# Altium PCB SensorBoard_Circuit.PcbDoc
Units mm, origin at the board's own origin, x right, y up, seen from the top; angles counter-clockwise.
Board outline 26.1 x 43.9 mm, 2 copper layers (Top Layer, Bottom Layer); 3 components, 18 nets, 62 pads, 88 vias.
Unrouted connection lines stored in the file: 16.
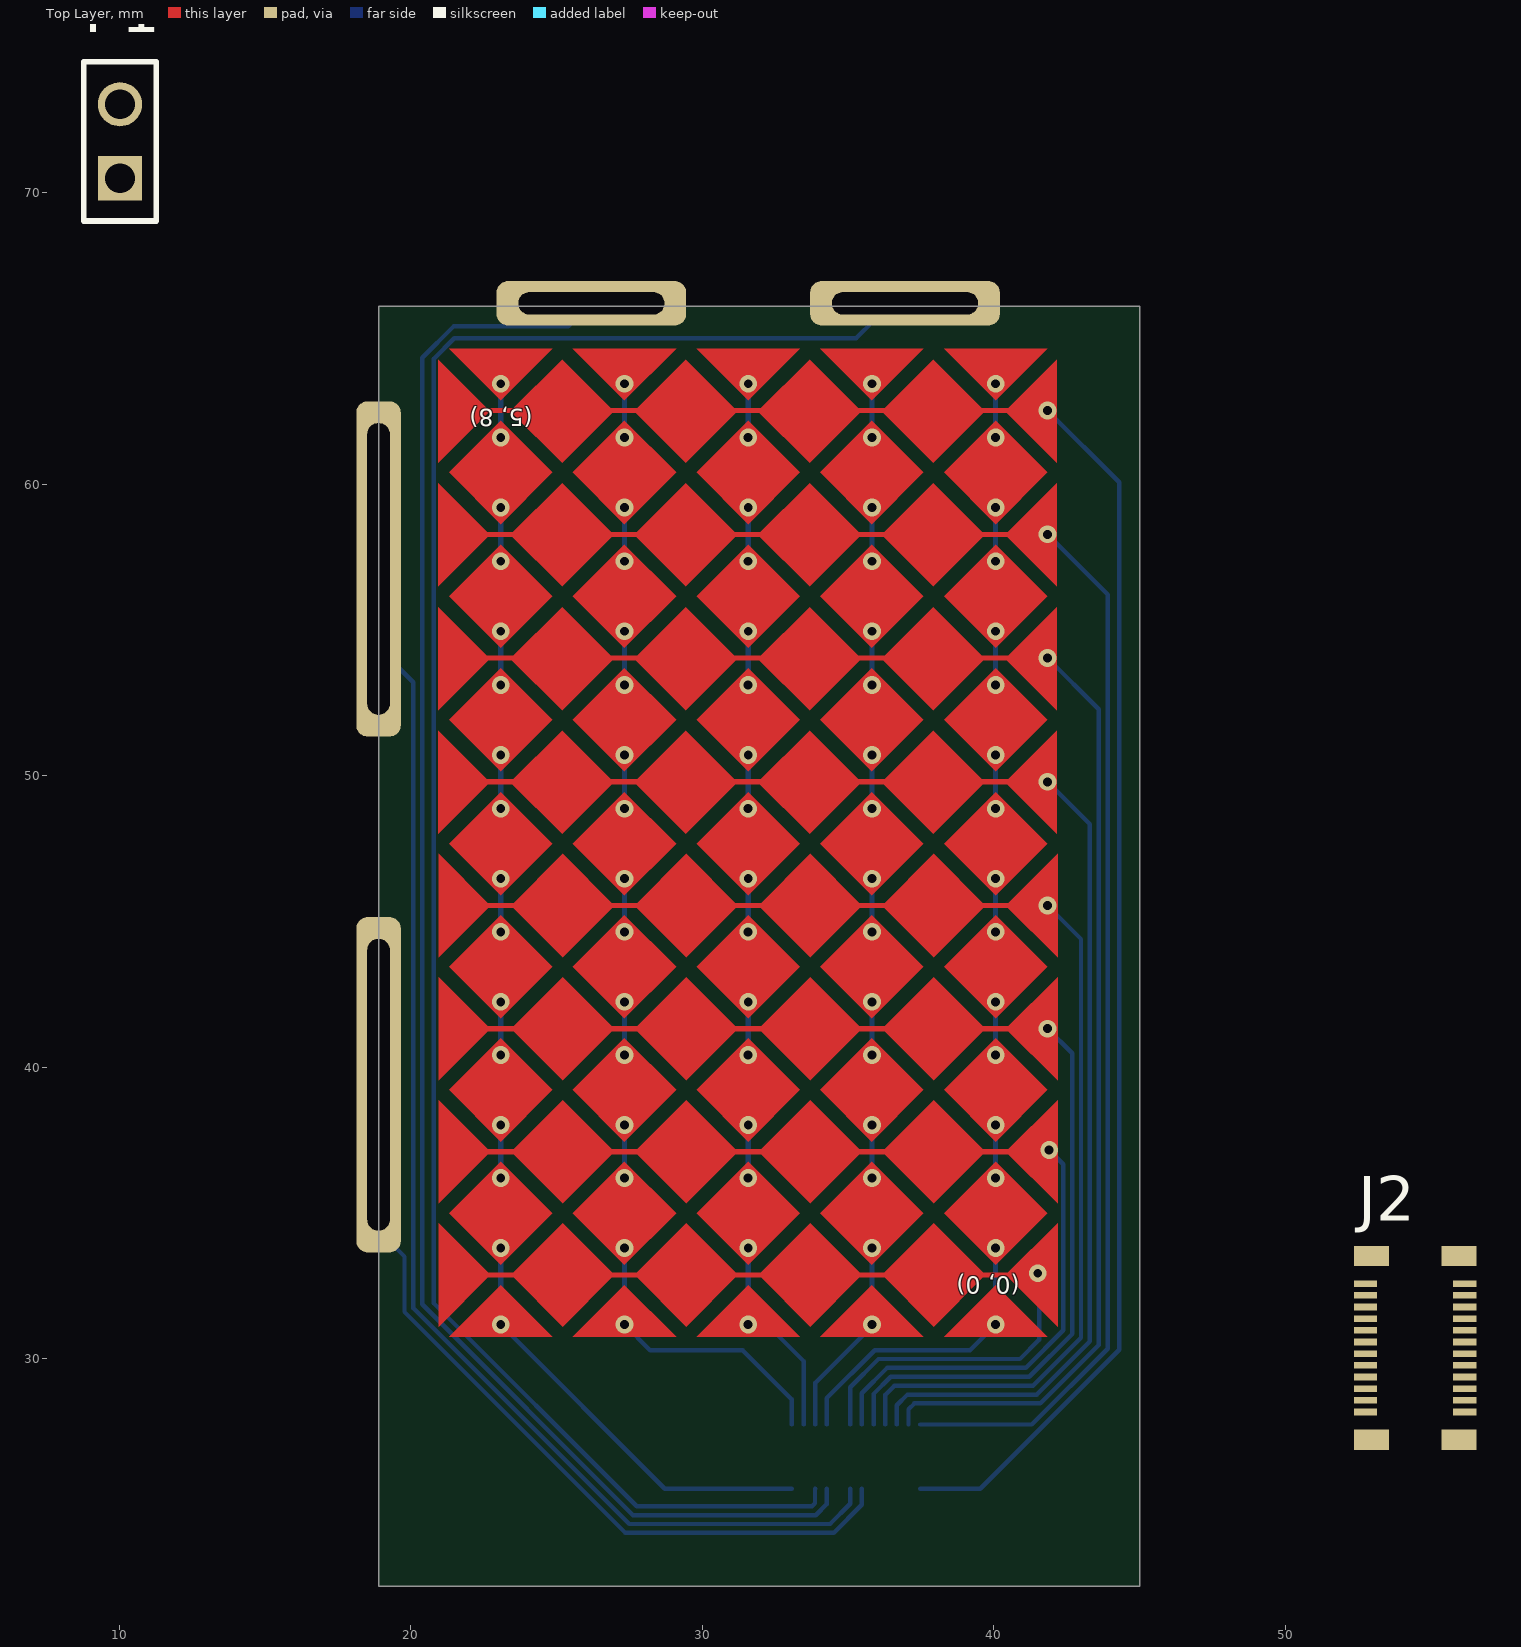
[diagram p0: Top Layer view]
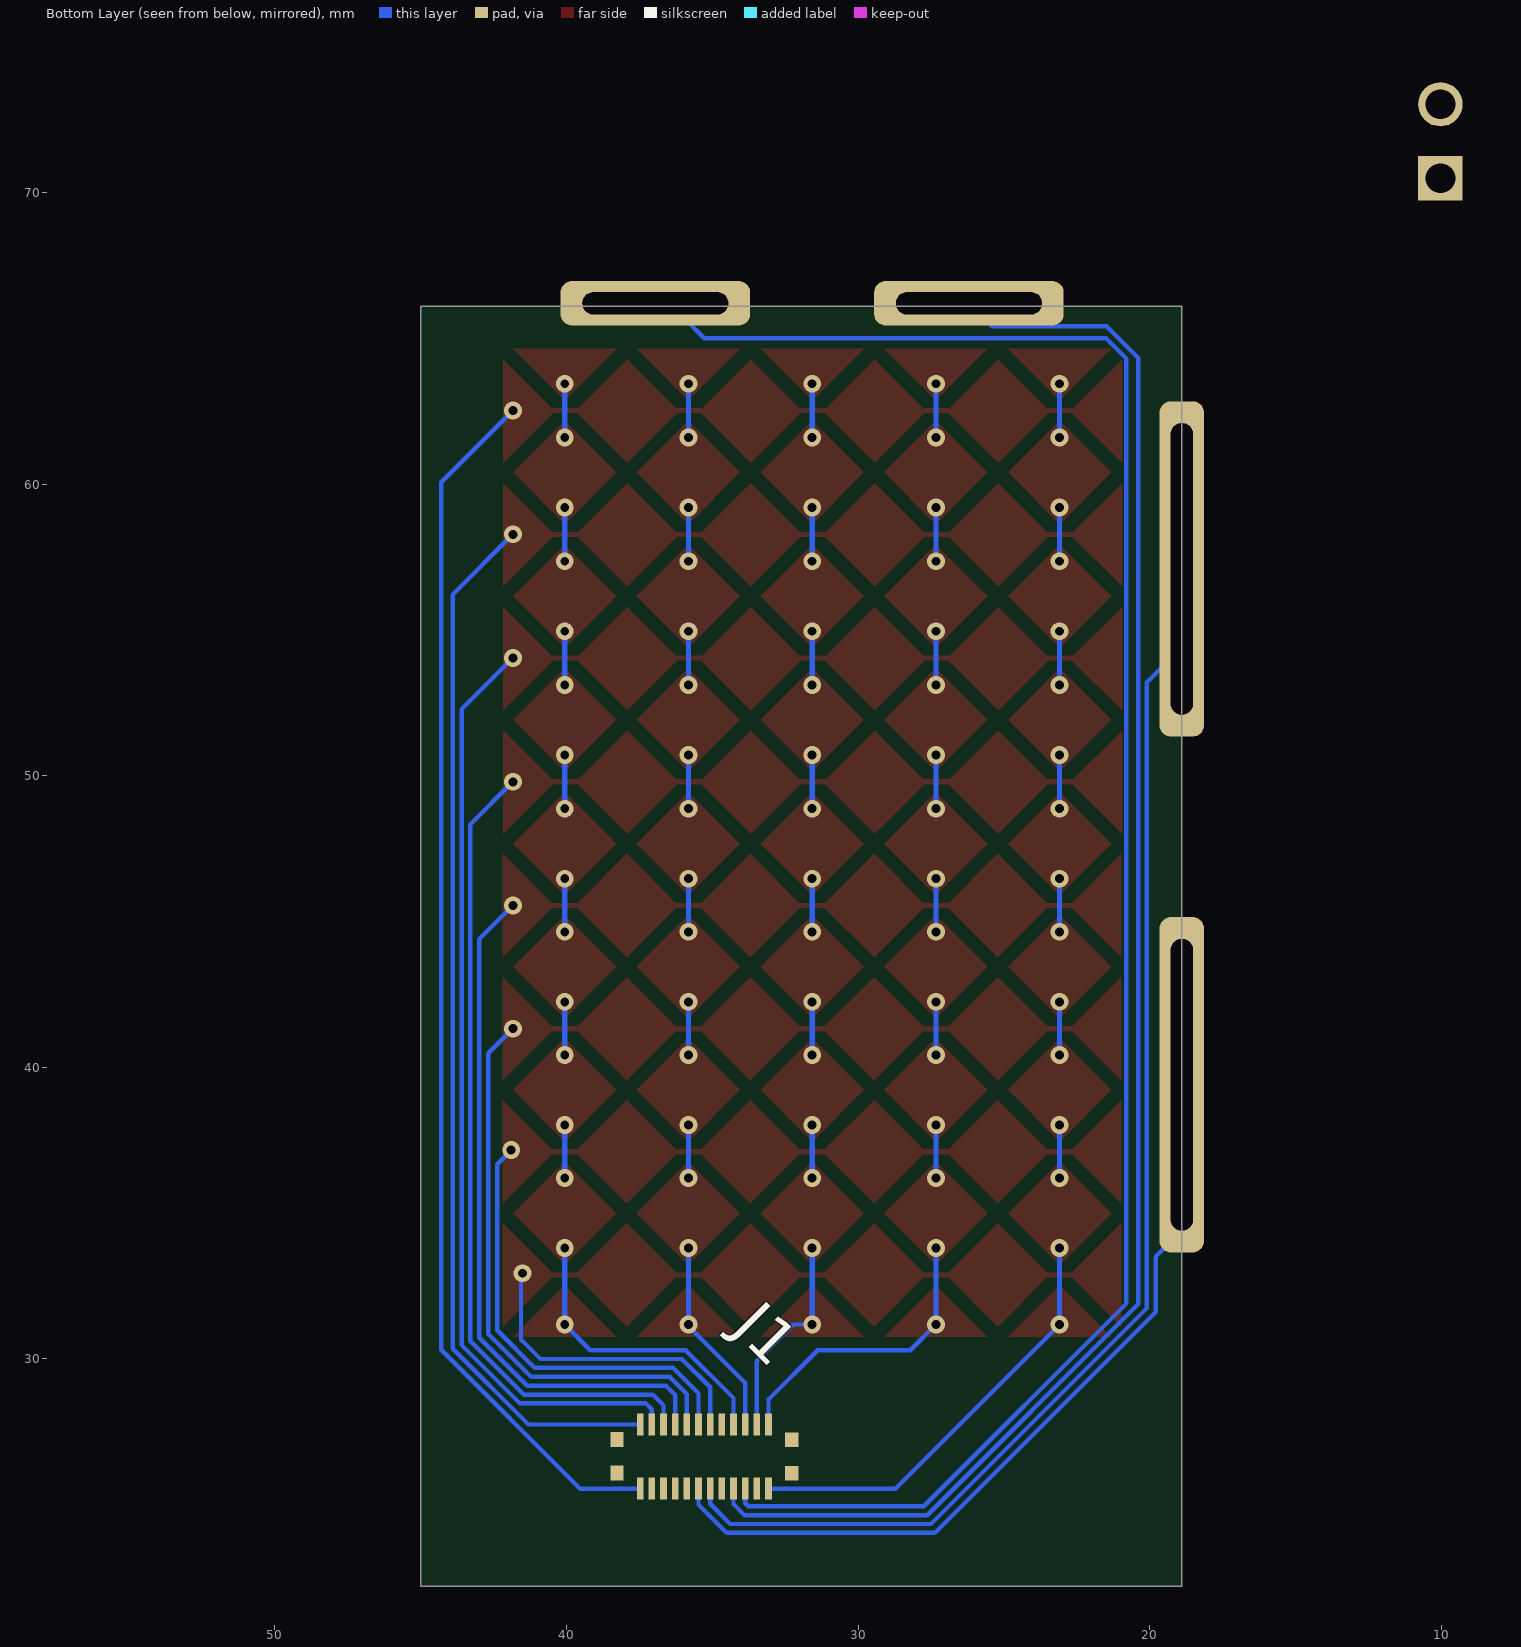
[diagram p1: Bottom Layer view, seen from below]

## Layer stack, top to bottom
Top Solder: solder mask 0.0102, Solder Resist, Dk 3.5
Top Layer: signal copper 0.0356
Dielectric 1: dielectric 0.32, FR-4, Dk 4.8
Bottom Layer: signal copper 0.0356
Bottom Solder: solder mask 0.0102, Solder Resist, Dk 3.5

## Board outline
18.9,22.2 45,22.2 45,66.1 18.9,66.1

## Design rules (kind name [scope] priority, off if disabled: settings)
BoardOutlineClearance [All] p1: gap=0.254 ignorepadtopadclearanceinfootprint=FALSE except(0: Arc-SplitContinuation Track-SplitContinuation SMDPad-SplitContinuation THPad-SplitContinuation Via-SplitContinuation Fill-SplitContinuation Poly-SplitContinuation Region-SplitContinuation Text-SplitContinuation; 0.508: Poly-OutlineEdge Poly-CavityEdge Poly-CutoutEdge Poly-SplitBarrior)
Clearance [All] p1: gap=0.152 ignorepadtopadclearanceinfootprint=FALSE except(0.305: Arc-Hole Track-Hole SMDPad-Hole THPad-Hole Via-Hole Fill-Hole Poly-Hole Region-Hole)
HoleSize [All] p1: absolutevalues=TRUE maxlimit=6.3 minlimit=0.3 maxpercent=80.000 minpercent=20.000
MinimumAnnularRing [All] p1: minimumring=0.152
PolygonConnect PolygonConnect_1 [All] p1: thpad.connectstyle=Relief thpad.reliefconductorwidth=0.254 thpad.reliefentries=4 thpad.polygonreliefangle="90 Angle" thpad.airgapwidth=0.254 smdpad.connectstyle=Relief smdpad.reliefconductorwidth=0.254 smdpad.reliefentries=4 smdpad.polygonreliefangle="90 Angle" smdpad.airgapwidth=0.254 via.connectstyle=Direct via.reliefconductorwidth=0.254 via.reliefentries=4 via.polygonreliefangle="90 Angle" via.airgapwidth=0.254
PolygonConnect gnd_stitch_via [InNet('GND') vs InNet('GND')] p2: thpad.connectstyle=Relief thpad.reliefconductorwidth=0.254 thpad.reliefentries=4 thpad.polygonreliefangle="90 Angle" thpad.airgapwidth=0.254 smdpad.connectstyle=Relief smdpad.reliefconductorwidth=0.254 smdpad.reliefentries=4 smdpad.polygonreliefangle="90 Angle" smdpad.airgapwidth=0.254 via.connectstyle=Direct via.reliefconductorwidth=0.254 via.reliefentries=4 via.polygonreliefangle="90 Angle" via.airgapwidth=0.254
PolygonConnect gnd_ties [InComponentClass('net_ties')] p3: connectstyle=Direct reliefconductorwidth=0.254 reliefentries=4 polygonreliefangle="90 Angle" airgapwidth=0.254
RoomDefinition CSX_Capsense [InComponentClass('CSX_Capsense')] p1: confinementstyle=ConfineOut formatcopy=TRUE lockcomponents=FALSE outline 85.344,47.244 93.853,47.244 93.853,51.816 85.344,51.816
RoutingVias [All] p1: holewidth=0.711 width=1.27 viastyle="Through Hole" minholewidth=0.305 minwidth=0.61 maxholewidth=0.711 maxwidth=1.27
SilkToSilkClearance [All] p1: silktosilkclearance=0.102
SilkToSolderMaskClearance [IsPad] p1: minsilkscreentomaskgap=0.178 clearancetoexposedcopper=TRUE
SolderMaskExpansion [All] p1: expansion=0.102 istentingtop=FALSE
Width [All] p1: maxlimit=3.556 minlimit=0.152 preferedwidth=0.254 toplayer_maxwidth=2.54 minimp=50.000000 maximp=50.000000 favimp=50.000000
27 further rules are at their usual default settings.

## Components (designator, comment, footprint, x,y, rotation, side; value= is the part's Value field where it differs from the comment)
J1 "AXT424124" AXT424124 35.8,26.7 r180 bottom
J2 "AXT324124" AXT324124 53.899,29.103 r90 top
P1 "MTLW-102-05-T-S-172" SMTC-MTLW-102-05-X-S-172 10.033,70.485 r90 top

## Footprints (in the part's own frame and the unit in brackets; to place one, negate y for a bottom-side part, rotate by r counter-clockwise, add the part's x,y. Pads: shape width x height; smd on the part's side, far side on the other; paste and mask are expansions set on the pad)
AXT324124 [mm]
  rect 0.23x0.8 smd mask+0.102: 1(-0.925,1.155) 2(-0.525,1.155) 3(-0.125,1.155) 4(0.275,1.155) 5(0.675,1.155) 6(1.075,1.155) 7(1.475,1.155) 8(1.875,1.155) 9(2.275,1.155) 10(2.675,1.155) 11(3.075,1.155) 12(3.475,1.155)
  rect 0.23x0.8 smd: 13(3.475,-2.255) 14(3.075,-2.255) 15(2.675,-2.255) 16(2.275,-2.255) 17(1.875,-2.255) 18(1.475,-2.255) 19(1.075,-2.255) 20(0.675,-2.255) 21(0.275,-2.255) 22(-0.125,-2.255) 23(-0.525,-2.255) 24(-0.925,-2.255)
  rect 0.7x1.2 smd: ""(-1.875,-2.05) ""(-1.875,0.95) ""(4.425,-2.06) ""(4.425,0.94)
AXT424124 [mm] "24 pin 0.4mm pitch"
  rect 0.23x0.75 smd: 1(2.725,1.05) 2(2.325,1.05) 3(1.925,1.05) 4(1.525,1.05) 5(1.125,1.05) 6(0.725,1.05) 7(0.325,1.05) 8(-0.075,1.05) 9(-0.475,1.05) 10(-0.875,1.05) 11(-1.275,1.05) 12(-1.675,1.05) 13(-1.675,-1.15) 14(-1.275,-1.15) 15(-0.875,-1.15) 16(-0.475,-1.15) 17(-0.075,-1.15) 18(0.325,-1.15) 19(0.725,-1.15) 20(1.125,-1.15) 21(1.525,-1.15) 22(1.925,-1.15) 23(2.325,-1.15) 24(2.725,-1.15)
  rect 0.45x0.5 smd: ""(-2.475,0.535) ""(-2.475,-0.615) ""(3.525,-0.625) ""(3.525,0.525)
SMTC-MTLW-102-05-X-S-172 [mm] "Terminal Assembly, 1x2 Pins, Vertical, 2.54mm Pitch, Male"
  rect 1.52x1.52 hole 1.02: 1(0,0)
  round 1.52 hole 1.02: 2(2.54,0)
  silkscreen extent -1.46,-1.24 4,1.24, body extent -1.27,-1.24 3.81,1.24, height 5.89

## Part data
P1: library part CMP-1024-00065-1, "Low Profile .025\" SQ Post Header, Through-hole, Vertical, -55 to 105 degC, 2.54 mm Pitch, 2-Pin, Male, RoHS", Manufacturer=Samtec, Temperature Range="-55 to 105 degC", ComponentLink1Description="Manufacturer URL", ComponentLink1URL=http://www.samtec.com, ComponentLink2Description=Datasheet, ComponentLink2URL=http://www.samtec.com/documents/webfiles/pdf/MTLW_TH.PDF, ComponentLink3Description="Package Specification", ComponentLink3URL=http://www.samtec.com/documents/webfiles/cpdf/MTLW-1XX-XX-XX-X-XXX-XX-XX-MKT1.pdf, DatasheetVersion=F-214, Mounting Technology=Through-hole, Orientation=Vertical, PackageDescription="Low Profile Terminal Assembly", PackageReference=MTLW-102-05-X-S-172, PackageVersion="T, 6/1991", PartNumber=MTLW-102-05-T-S-172, Pitch="2.54 mm", RoHS=True

## Free pads (board coordinates)
  rrect50% 1.524x11.5 hole 0.762 slot 10 at 90 deg: 3(18.9,39.4) 3(18.9,57.089)
  rrect50% 6.5x1.524 hole 0.762 slot 5 at 0 deg: 3(26.2,66.2) 3(36.954,66.2)

## Via types
v1: diameter 0.61, hole 0.305, Top Layer to Bottom Layer, 88 vias

## Nets (pads, with @x,y where several pads share a name; then routed paths per layer and width w, separated by ;. In a path a pad name is that pad's centre, name@x,y a point inside that pad or via, vN(x,y) a via of type N, cw(c..) or ccw(c..) an arc to the next point about the centre after c; other vN are vias at no path point)
GND: J1.5 J1.23 P1.1 P1.2
RX0_PAD: J1.6 J2.1 | length 30
  Top Layer w0.178: 22.283,32.877 41.448,32.877 v1(41.506,32.936)
  Bottom Layer w0.152: J1.6 35.075,29.024 36.046,29.995 40.895,29.995 41.562,30.662 41.562,32.879 v1(41.506,32.936)
RX1_PAD: J1.7 J2.2 | length 34.8
  Top Layer w0.178: 22.283,37.1 v1@41.841,37.1
  Bottom Layer w0.152: J1.7 35.475,28.825 36.34,29.69 41.09,29.69 42.381,30.981 42.381,36.676 v1(41.899,37.158)
RX2_PAD: J1.8 J2.3 | length 39.1
  Top Layer w0.178: 22.283,41.323 v1(41.841,41.323)
  Bottom Layer w0.152: J1.8 35.875,28.794 36.466,29.386 41.217,29.386 42.686,30.855 42.686,40.479 v1(41.841,41.323)
RX3_PAD: J1.9 J2.4 | length 43.4
  Top Layer w0.178: 22.283,45.546 v1(41.841,45.546)
  Bottom Layer w0.152: J1.9 36.275,28.763 36.593,29.081 41.343,29.081 42.99,30.728 42.99,44.397 v1(41.841,45.546)
RX4_PAD: J1.10 J2.5 | length 47.5
  Top Layer w0.178: 22.283,49.789 v1(41.841,49.789)
  Bottom Layer w0.152: J1.10 36.675,28.411 37.04,28.776 41.469,28.776 43.295,30.602 43.295,48.335 v1(41.841,49.789)
RX5_PAD: J1.11 J2.6 | length 52.1
  Top Layer w0.178: 22.283,54.032 v1(41.841,54.032)
  Bottom Layer w0.152: J1.11 37.075,28.27 37.277,28.471 41.595,28.471 43.6,30.476 43.6,52.273 v1(41.841,54.032) 41.773,54.1 v1@41.6,54.1
RX6_PAD: J1.12 J2.7 | length 55.8
  Top Layer w0.178: 22.283,58.275 v1(41.841,58.275)
  Bottom Layer w0.152: J1.12 41.305,27.75 43.905,30.35 43.905,56.211 v1(41.841,58.275)
RX7_PAD: J1.13 J2.8 | length 61.6
  Top Layer w0.178: 22.283,62.518 v1(41.841,62.518)
  Bottom Layer w0.152: J1.13 39.536,25.55 44.3,30.314 44.3,60.059 v1(41.841,62.518)
SHEX_0: J1.18 pad.3@18.9,39.4 | length 28.1
  Bottom Layer w0.152: pad.3@18.4,39.4 18.898,38.902 18.898,34.402 19.79,33.51 19.79,31.61 27.368,24.032 34.51,24.032 35.475,24.997 J1.18
SHEX_1: J1.19 pad.3@18.9,57.089 | length 47
  Bottom Layer w0.152: pad.3@18.4,51.995 pad.3@18.4,57.089 ; pad.3@19,54.3 20.095,53.205 20.095,31.743 27.501,24.337 34.384,24.337 35.075,25.028 J1.19
SHEY_0: J1.21 pad.3@26.2,66.2 | length 59.1
  Bottom Layer w0.152: pad.3@23.712,66.7 pad.3@26.2,66.7 ; pad.3@26.2,66.2 25.405,65.405 21.474,65.405 20.4,64.331 20.4,31.869 27.627,24.642 33.897,24.642 34.275,25.019 J1.21
SHEY_1: J1.22 pad.3@36.954,66.2 | length 66.2
  Bottom Layer w0.152: J1.22 33.868,25.543 33.868,25.049 33.765,24.946 27.754,24.946 20.8,31.9 20.8,64.3 21.5,65 35.276,65 pad.3@35.888,65.612 ; pad.3@35.575,65.537 36.238,66.2 pad.3@36.954,66.2
TX0_PAD: J1.4 J2.24 | length 24
  Bottom Layer w0.152: J1.4 34.275,28.656 35.919,30.3 39.184,30.3 v1(40.063,31.179)
  Bottom Layer w0.178: v1(40.063,31.179) v1(40.063,33.799) ; v1@40.063,36.199 v1(40.063,38.022) ; v1@40.063,40.222 v1(40.063,40.422) v1(40.063,42.245) ; v1(40.063,44.645) v1(40.063,46.468) ; v1(40.063,48.868) v1(40.063,50.711) ; v1(40.063,53.111) v1(40.063,54.954) ; v1@40.063,57.154 v1(40.063,57.354) v1(40.063,59.197) v1@40.063,59.397 ; v1@40.063,61.397 v1(40.063,61.597) v1(40.063,63.44)
  other v1: 40.063,36.199
TX1_PAD: J1.3 J2.23 | length 21.7
  Bottom Layer w0.152: J1.3 33.875,29.175 35.82,31.12 v1(35.82,31.179)
  Bottom Layer w0.178: v1(35.82,31.179) v1(35.82,33.799) ; v1(35.82,40.422) v1(35.82,42.245) ; v1(35.82,44.645) v1(35.82,46.468) ; v1(35.82,48.868) v1(35.82,50.711) ; v1(35.82,53.111) v1(35.82,54.954) ; v1(35.82,57.354) v1(35.82,59.197) ; v1@35.82,61.397 v1(35.82,63.44) ; v1(35.82,36.199) v1(35.82,38.022) v1(35.82,36.199)
  other v1: 35.82,61.597
TX2_PAD: J1.2 J2.22 | length 20.1
  Bottom Layer w0.152: v1(31.577,31.179) 32.221,31.179 33.475,29.925 J1.2
  Bottom Layer w0.178: v1(31.577,31.179) v1(31.577,33.799) ; v1@31.577,36.179 v1(31.577,38.022) ; v1@31.577,40.402 v1(31.577,42.245) ; v1@31.577,44.625 v1(31.577,46.468) ; v1(31.577,48.868) v1(31.577,50.711) ; v1(31.577,53.111) v1(31.577,54.954) ; v1(31.577,57.354) v1(31.577,59.197) ; v1(31.577,61.597) v1(31.577,63.44)
  other v1: 31.577,36.199 31.577,40.422 31.577,44.645
TX3_PAD: J1.1 J2.21 | length 23.2
  Bottom Layer w0.152: v1(27.334,31.179) 28.212,30.3 31.385,30.3 33.075,28.61 J1.1
  Bottom Layer w0.178: v1(27.334,31.179) v1(27.334,33.799) ; v1@27.334,36.179 v1(27.334,38.022) ; v1@27.334,40.402 v1(27.334,42.245) ; v1@27.334,44.625 v1(27.334,46.468) ; v1(27.334,48.868) v1(27.334,50.711) ; v1(27.334,53.111) v1(27.334,54.954) ; v1(27.334,57.354) v1(27.334,59.197) ; v1(27.334,61.597) v1(27.334,63.44)
  other v1: 27.334,36.199 27.334,40.422 27.334,44.645
TX4_PAD: J1.24 J2.20 | length 27.8
  Bottom Layer w0.152: v1(23.091,31.179) 28.719,25.55 J1.24
  Bottom Layer w0.178: v1(23.091,31.179) v1(23.091,33.799) ; v1@23.091,36.179 v1(23.091,38.022) ; v1@23.091,40.402 v1(23.091,42.245) ; v1@23.091,44.625 v1(23.091,46.468) ; v1(23.091,48.868) v1(23.091,50.711) ; v1(23.091,53.111) v1(23.091,54.954) ; v1(23.091,57.354) v1(23.091,59.197) ; v1(23.091,61.597) v1(23.091,63.44)
  other v1: 23.091,36.199 23.091,40.422 23.091,44.645
pads on no net: J1. J1.14 J1.15 J1.16 J1.17 J1.20 J2. J2.9 J2.10 J2.11 J2.12 J2.13 J2.14 J2.15 J2.16 J2.17 J2.18 J2.19

## Other copper
Top Layer:
  region net RX0_PAD: 42.185,34.645 42.185,31.11 40.417,32.877
  region net RX0_PAD: 25.213,34.645 26.98,32.877 25.213,31.11 23.445,32.877
  region net RX0_PAD: 35.467,32.877 33.699,31.11 31.931,32.877 33.699,34.645
  region net RX0_PAD: 39.709,32.877 37.942,31.11 36.174,32.877 37.942,34.645
  region net RX0_PAD: 29.456,34.645 31.223,32.877 29.456,31.11 27.688,32.877
  region net RX0_PAD: 20.97,34.645 22.737,32.877 20.97,31.11
  region net RX1_PAD: 35.467,37.1 33.699,35.333 31.931,37.1 33.699,38.868
  region net RX1_PAD: 39.709,37.1 37.942,35.333 36.174,37.1 37.942,38.868
  region net RX1_PAD: 29.456,38.868 31.223,37.1 29.456,35.333 27.688,37.1
  region net RX1_PAD: 42.185,38.868 42.185,35.333 40.417,37.1
  region net RX1_PAD: 20.97,38.868 22.737,37.1 20.97,35.333
  region net RX1_PAD: 25.213,38.868 26.98,37.1 25.213,35.333 23.445,37.1
  region net RX2_PAD: 35.467,41.323 33.699,39.556 31.931,41.323 33.699,43.091
  region net RX2_PAD: 39.709,41.323 37.942,39.556 36.174,41.323 37.942,43.091
  region net RX2_PAD: 29.456,43.091 31.223,41.323 29.456,39.556 27.688,41.323
  region net RX2_PAD: 42.185,43.091 42.185,39.556 40.417,41.323
  region net RX2_PAD: 20.97,43.091 22.737,41.323 20.97,39.556
  region net RX2_PAD: 25.213,43.091 26.98,41.323 25.213,39.556 23.445,41.323
  region net RX4_PAD: 35.447,49.77 33.679,48.002 31.911,49.77 33.679,51.538
  region net RX4_PAD: 39.69,49.77 37.922,48.002 36.154,49.77 37.922,51.538
  region net RX4_PAD: 29.436,51.538 31.204,49.77 29.436,48.002 27.668,49.77
  region net RX4_PAD: 42.165,51.538 42.165,48.002 40.397,49.77
  region net RX4_PAD: 20.95,51.538 22.718,49.77 20.95,48.002
  region net RX4_PAD: 25.193,51.538 26.961,49.77 25.193,48.002 23.425,49.77
  region net RX5_PAD: 42.165,55.781 42.165,52.245 40.397,54.013
  region net RX5_PAD: 35.447,54.013 33.679,52.245 31.911,54.013 33.679,55.781
  region net RX5_PAD: 39.69,54.013 37.922,52.245 36.154,54.013 37.922,55.781
  region net RX5_PAD: 25.193,55.781 26.961,54.013 25.193,52.245 23.425,54.013
  region net RX5_PAD: 29.436,55.781 31.204,54.013 29.436,52.245 27.668,54.013
  region net RX5_PAD: 20.95,55.781 22.718,54.013 20.95,52.245
  region net RX6_PAD: 42.165,60.024 42.165,56.488 40.397,58.256
  region net RX6_PAD: 25.193,60.024 26.961,58.256 25.193,56.488 23.425,58.256
  region net RX6_PAD: 35.447,58.256 33.679,56.488 31.911,58.256 33.679,60.024
  region net RX6_PAD: 39.69,58.256 37.922,56.488 36.154,58.256 37.922,60.024
  region net RX6_PAD: 29.436,60.024 31.204,58.256 29.436,56.488 27.668,58.256
  region net RX6_PAD: 20.95,60.024 22.718,58.256 20.95,56.488
  region net RX7_PAD: 42.165,64.267 42.165,60.731 40.397,62.499
  region net RX7_PAD: 25.193,64.267 26.961,62.499 25.193,60.731 23.425,62.499
  region net RX7_PAD: 35.447,62.499 33.679,60.731 31.911,62.499 33.679,64.267
  region net RX7_PAD: 39.69,62.499 37.922,60.731 36.154,62.499 37.922,64.267
  region net RX7_PAD: 29.436,64.267 31.204,62.499 29.436,60.731 27.668,62.499
  region net RX7_PAD: 20.95,64.267 22.718,62.499 20.95,60.731
  region net TX0_PAD: 41.831,64.64 40.063,62.872 38.295,64.64
  region net TX0_PAD: 41.831,60.397 40.063,58.629 38.295,60.397 40.063,62.165
  region net TX0_PAD: 41.831,51.911 40.063,50.143 38.295,51.911 40.063,53.679
  region net RX3_PAD: 39.709,45.546 37.942,43.779 36.174,45.546 37.942,47.314
  region net RX3_PAD: 42.185,47.314 42.185,43.779 40.417,45.546
  region net TX0_PAD: 41.831,43.445 40.063,41.677 38.295,43.445 40.063,45.213
  region net TX0_PAD: 41.831,39.222 40.063,37.454 38.295,39.222 40.063,40.99
  region net TX0_PAD: 41.831,34.999 40.063,33.231 38.295,34.999 40.063,36.767
  region net TX0_PAD: 41.831,30.756 38.295,30.756 40.063,32.524
  region net TX2_PAD: 33.345,60.397 31.577,58.629 29.809,60.397 31.577,62.165
  region net TX2_PAD: 33.345,64.64 31.577,62.872 29.809,64.64
  region net TX2_PAD: 33.345,51.911 31.577,50.143 29.809,51.911 31.577,53.679
  region net RX3_PAD: 29.456,47.314 31.223,45.546 29.456,43.779 27.688,45.546
  region net TX2_PAD: 33.345,43.445 31.577,41.677 29.809,43.445 31.577,45.213
  region net TX2_PAD: 33.345,39.222 31.577,37.454 29.809,39.222 31.577,40.99
  region net TX2_PAD: 33.345,34.999 31.577,33.231 29.809,34.999 31.577,36.767
  region net TX2_PAD: 33.345,30.756 29.809,30.756 31.577,32.524
  region net TX4_PAD: 24.859,60.397 23.091,58.629 21.323,60.397 23.091,62.165
  region net TX4_PAD: 24.859,64.64 23.091,62.872 21.323,64.64
  region net TX4_PAD: 24.859,51.911 23.091,50.143 21.323,51.911 23.091,53.679
  region net RX3_PAD: 20.97,47.314 22.737,45.546 20.97,43.779
  region net TX4_PAD: 24.859,43.445 23.091,41.677 21.323,43.445 23.091,45.213
  region net TX4_PAD: 24.859,39.222 23.091,37.454 21.323,39.222 23.091,40.99
  region net TX4_PAD: 24.859,34.999 23.091,33.231 21.323,34.999 23.091,36.767
  region net TX4_PAD: 24.859,30.756 21.323,30.756 23.091,32.524
  region net TX0_PAD: 41.831,56.154 40.063,54.386 38.295,56.154 40.063,57.922
  region net TX0_PAD: 41.831,47.668 40.063,45.9 38.295,47.668 40.063,49.436
  region net TX2_PAD: 33.345,56.154 31.577,54.386 29.809,56.154 31.577,57.922
  region net TX2_PAD: 33.345,47.668 31.577,45.9 29.809,47.668 31.577,49.436
  region net TX4_PAD: 24.859,56.154 23.091,54.386 21.323,56.154 23.091,57.922
  region net TX4_PAD: 24.859,47.668 23.091,45.9 21.323,47.668 23.091,49.436
  region net TX1_PAD: 37.588,60.397 35.82,58.629 34.052,60.397 35.82,62.165
  region net TX1_PAD: 37.588,64.64 35.82,62.872 34.052,64.64
  region net TX1_PAD: 37.588,51.911 35.82,50.143 34.052,51.911 35.82,53.679
  region net RX3_PAD: 35.467,45.546 33.699,43.779 31.931,45.546 33.699,47.314
  region net TX1_PAD: 37.588,43.445 35.82,41.677 34.052,43.445 35.82,45.213
  region net TX1_PAD: 37.588,39.222 35.82,37.454 34.052,39.222 35.82,40.99
  region net TX1_PAD: 37.588,34.999 35.82,33.231 34.052,34.999 35.82,36.767
  region net TX1_PAD: 37.588,30.756 34.052,30.756 35.82,32.524
  region net TX3_PAD: 29.102,60.397 27.334,58.629 25.566,60.397 27.334,62.165
  region net TX3_PAD: 29.102,64.64 27.334,62.872 25.566,64.64
  region net TX3_PAD: 29.102,51.911 27.334,50.143 25.566,51.911 27.334,53.679
  region net RX3_PAD: 25.213,47.314 26.98,45.546 25.213,43.779 23.445,45.546
  region net TX3_PAD: 29.102,43.445 27.334,41.677 25.566,43.445 27.334,45.213
  region net TX3_PAD: 29.102,39.222 27.334,37.454 25.566,39.222 27.334,40.99
  region net TX3_PAD: 29.102,34.999 27.334,33.231 25.566,34.999 27.334,36.767
  region net TX3_PAD: 29.102,30.756 25.566,30.756 27.334,32.524
  region net TX1_PAD: 37.588,56.154 35.82,54.386 34.052,56.154 35.82,57.922
  region net TX1_PAD: 37.588,47.668 35.82,45.9 34.052,47.668 35.82,49.436
  region net TX3_PAD: 29.102,56.154 27.334,54.386 25.566,56.154 27.334,57.922
  region net TX3_PAD: 29.102,47.668 27.334,45.9 25.566,47.668 27.334,49.436

## Silkscreen, mask and mechanical layers (free items; w line width, h text height)
Top Overlay:
  text "(5, 8)" at 24.184,62.768 h1.02 r180
  text "(0, 0)" at 40.894,33.02 h1.02 r180
Mechanical 1:
  the board outline again, w0.203